# Altium PCB SurvBot_RCU.PcbDoc
Units mm, origin at the board's own origin, x right, y up, seen from the top; angles counter-clockwise.
Board outline 152.4 x 101.6 mm, 4 copper layers (Top Layer, Int1 (GND), Int2 (PWR), Bottom Layer), stack 1.591 mm thick; 147 components, 99 nets, 569 pads, 8 vias.
Unrouted connection lines stored in the file: 385.
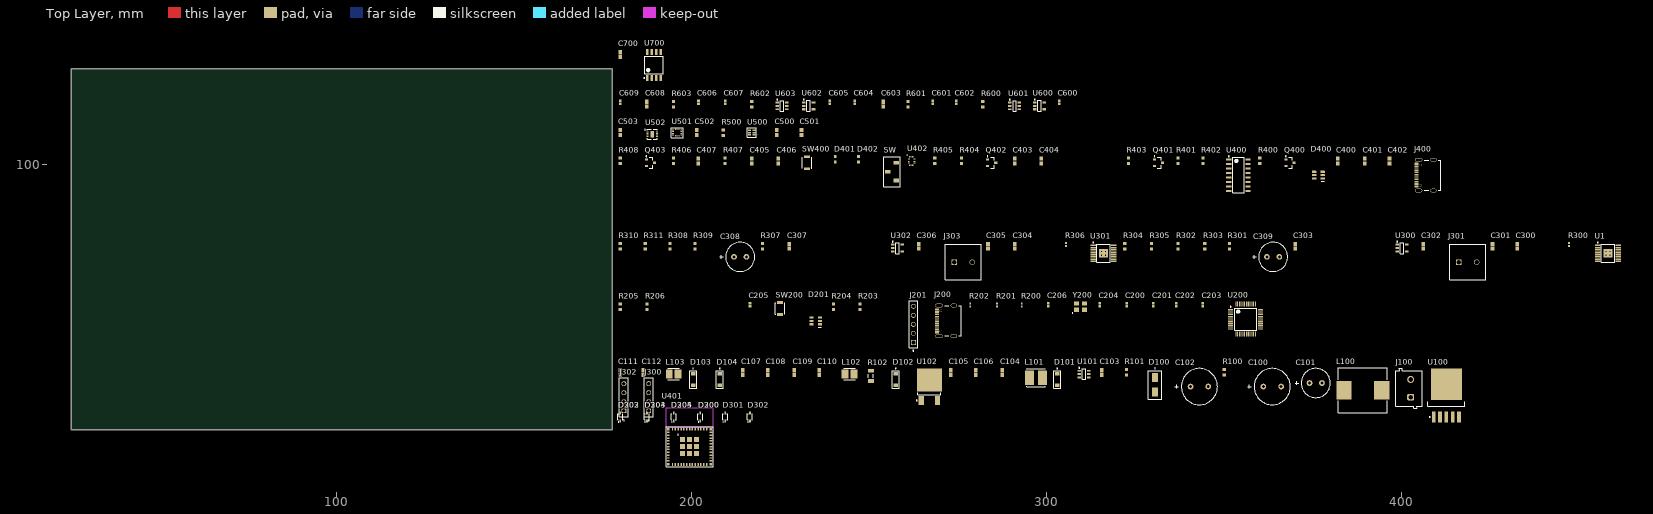
[diagram p0: Top Layer view]
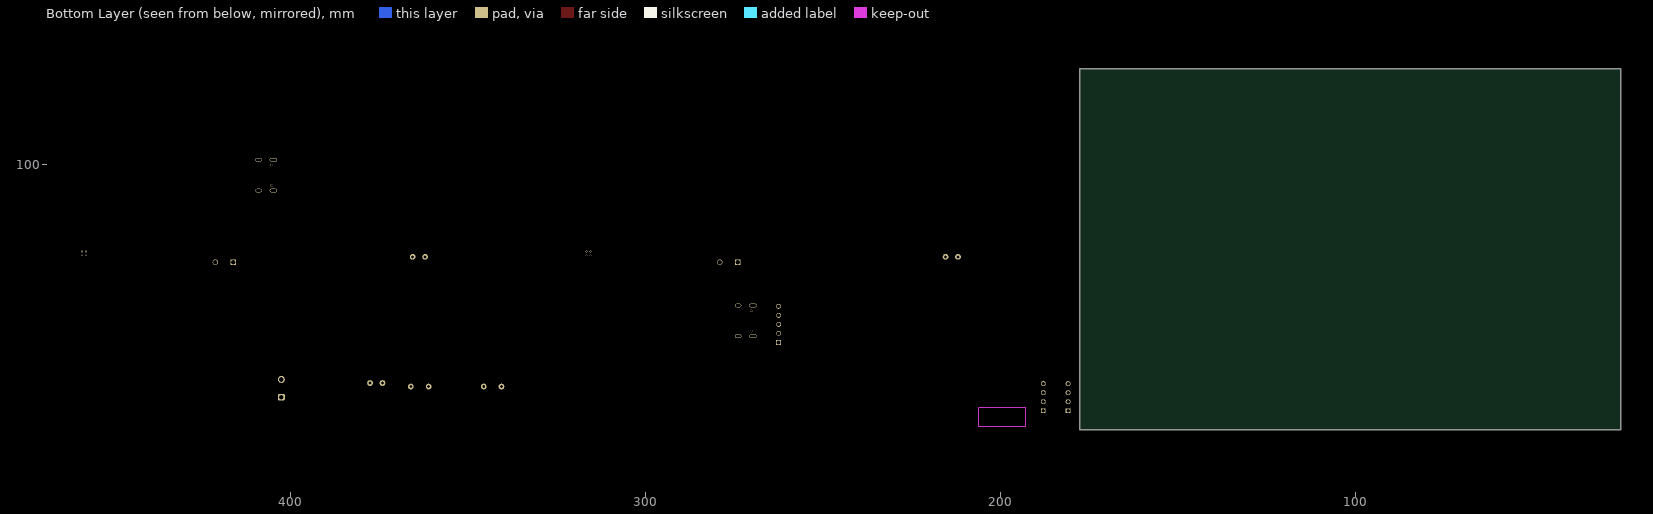
[diagram p1: Bottom Layer view, seen from below]

## Layer stack, top to bottom
Top Solder: solder mask 0.0254, SM-001, Dk 4
Top Layer: signal copper 0.035
Dielectric 1: prepreg 0.2104, PP-017, Dk 4.6
Int1 (GND): signal copper 0.0175
Dielectric 3: core 1.065, Core-039, Dk 4.6
Int2 (PWR): signal copper 0.0175
Dielectric 5: prepreg 0.2104, PP-017, Dk 4.6
Bottom Layer: signal copper 0.035
Bottom Solder: solder mask 0.0254, SM-001, Dk 4

## Board outline
25.4,25.4 177.8,25.4 177.8,127 25.4,127

## Design rules (kind name [scope] priority, off if disabled: settings)
Clearance [All] p1: gap=0.2 ignorepadtopadclearanceinfootprint=TRUE except(0.15: Arc-Arc Arc-Track Arc-SMDPad Arc-THPad Track-Track Track-SMDPad Track-THPad)
DiffPairsRouting [All] p1: maxlimit=0.254 minlimit=0.254 mostfreqgap=0.254 toplayer_minwidth=0.381 toplayer_maxwidth=0.381 toplayer_prefwidth=0.381 midlayer1_minwidth=0.381 midlayer1_maxwidth=0.381 midlayer1_prefwidth=0.381 midlayer2_minwidth=0.381 midlayer2_maxwidth=0.381 midlayer2_prefwidth=0.381 bottomlayer_minwidth=0.381 bottomlayer_maxwidth=0.381 bottomlayer_prefwidth=0.381 maxuncoupledlength=12.7
PolygonConnect [All] p1: connectstyle=Relief reliefconductorwidth=0.254 reliefentries=4 polygonreliefangle="90 Angle" airgapwidth=0.254
RoutingVias [All] p1: holewidth=0.711 width=1.27 viastyle="Through Hole" minholewidth=0.711 minwidth=1.27 maxholewidth=0.711 maxwidth=1.27
SolderMaskExpansion [All] p1: expansion=0.102 istentingtop=FALSE
SupplyNets "Schematic Supply Nets_4" [InNet('GND')] p1: voltage=0.000
SupplyNets "Schematic Supply Nets_9" [InNet('VBUS2')] p2: voltage=0.000
SupplyNets "Schematic Supply Nets_8" [InNet('+3V3')] p3: voltage=0.000
SupplyNets "Schematic Supply Nets_7" [InNet('VBUS1')] p4: voltage=0.000
SupplyNets "Schematic Supply Nets_6" [InNet('+VCOM')] p5: voltage=0.000
SupplyNets "Schematic Supply Nets_5" [InNet('+5VC')] p6: voltage=0.000
SupplyNets "Schematic Supply Nets_3" [InNet('+3V3A')] p7: voltage=0.000
SupplyNets "Schematic Supply Nets_2" [InNet('+6V')] p8: voltage=0.000
SupplyNets "Schematic Supply Nets_1" [InNet('+5VF')] p9: voltage=0.000
SupplyNets "Schematic Supply Nets" [InNet('+VBATT')] p10: voltage=0.000
UnRoutedNet [All] p1: checkbadconnections=TRUE
Width [All] p1: maxlimit=0.254 minlimit=0.254 preferedwidth=0.254
28 further rules are at their usual default settings.

## Classes and differential pairs
differential pair class USB: BT_USB_D USB_D
component class U_7_SurvBot_RCU_ExternalMemory: C700 U700
component class U_6_SurvBot_RCU_CurrentFeedback: C600 C601 C602 C603 C604 C605 C606 C607 C608 C609 R600 R601 R602 R603 U600 U601 U602 U603
component class U_5_SurvBot_RCU_Sensors: C500 C501 C502 C503 R500 U500 U501 U502
component class U_4_SurvBot_RCU_Bluetooth: C400 C401 C402 C403 C404 C405 C406 C407 D400 D401 D402 J400 Q400 Q401 Q402 Q403 R400 R401 R402 R403 R404 R405 R406 R407 R408 SW SW400 U400 U401 U402
component class U_3_SurvBot_RCU_MotorControl: C300 C301 C302 C303 C304 C305 C306 C307 C308 C309 D300 D301 D302 D303 D304 D305 J300 J301 J302 J303 R300 R301 R302 R303 R304 R305 R306 R307 R308 R309 R310 R311 U1 U300 U301 U302
component class U_2_SurvBot_RCU_MCU: C200 C201 C202 C203 C204 C205 C206 D200 D201 D202 D203 D204 J200 J201 R200 R201 R202 R203 R204 R205 R206 SW200 U200 Y200
component class U_1_SurvBot_RCU_Power: C100 C101 C102 C103 C104 C105 C106 C107 C108 C109 C110 C111 C112 D100 D101 D102 D103 D104 J100 L100 L101 L102 L103 R100 R101 R102 U100 U101 U102
differential pair USB_D: +USB_D_P -USB_D_N
differential pair BT_USB_D: +BT_USB_D_P -BT_USB_D_N

## Components (designator, comment, footprint, x,y, rotation, side; value= is the part's Value field where it differs from the comment)
C100 "470uF" CAP-THT_RADIAL_D10.00mm_P5.00mm 360.999,37.5 r0 top
C101 "100uF" CAP-THT-Radial__D8.0mmP3.5mm 373.999,38.5 r0 top
C102 "1000uF" CAP-THT_RADIAL_D10.00mm_P5.00mm 340.499,37.5 r0 top
C103 "100nF" CAP_0603 315.499,41.5 r90 top
C104 "22uF" CAP_0603 287.499,41.5 r90 top
C105 "22uF" CAP_0603 272.999,41.5 r90 top
C106 "22uF" CAP_0603 279.999,41.5 r90 top
C107 "1uF" CAP_0603 214.5,41.5 r90 top
C108 "1uF" CAP_0603 221.5,41.5 r90 top
C109 "22uF" CAP_0603 229,41.5 r90 top
C110 "22uF" CAP_0603 236,41.5 r90 top
C111 "1uF" CAP_0603 180,41.5 r90 top
C112 "1uF" CAP_0603 186.5,41.5 r90 top
C200 "1uF" CAP_0402 322.499,60.5 r90 top
C201 "100nF" CAP_0402 329.999,60.5 r90 top
C202 "4.7uF" CAP_0402 336.499,60.5 r90 top
C203 "100nF" CAP_0402 343.999,60.5 r90 top
C204 "14pF" CAP_0402 314.999,60.5 r90 top
C205 "100nF" CAP_0402 216.5,60.5 r90 top
C206 "14pF" CAP_0402 300.499,60.5 r90 top
C300 "100nF" CAP_0603 432.499,77 r90 top
C301 "22nF" CAP_0603 425.499,77 r90 top
C302 "100nF" CAP_0603 405.999,77 r90 top
C303 "100nF" CAP_0603 369.999,77 r90 top
C304 "100nF" CAP_0603 290.999,77 r90 top
C305 "22nF" CAP_0603 283.499,77 r90 top
C306 "100nF" CAP_0603 263.999,77 r90 top
C307 "100nF" CAP_0603 227.5,77 r90 top
C308 "220uF" CAP-THT-Radial__D8.0mmP3.5mm 212,74 r0 top
C309 "220uF" CAP-THT-Radial__D8.0mmP3.5mm 361.999,74 r0 top
C400 "10uF" CAP_0603 381.999,101 r90 top
C401 "100nF" CAP_0603 389.499,101 r90 top
C402 "100nF" CAP_0603 396.499,101 r90 top
C403 "1uF" CAP_0603 290.999,101 r90 top
C404 "100nF" CAP_0603 298.5,101 r90 top
C405 "100nF" CAP_0603 217,101 r90 top
C406 "1uF" CAP_0603 224.5,101 r90 top
C407 "100nF" CAP_0603 202,101 r90 top
C500 "100nF" CAP_0603 224,109 r90 top
C501 "100nF" CAP_0603 231,109 r90 top
C502 "1uF" CAP_0603 201.5,109 r90 top
C503 "100nF" CAP_0603 180,109 r90 top
C600 "100nF" CAP_0402 303.499,117.5 r90 top
C601 "10uF" CAP_0402 267.999,117.5 r90 top
C602 "100nF" CAP_0402 274.499,117.5 r90 top
C603 "100nF" CAP_0603 253.999,117 r90 top
C604 "1nF" CAP_0402 246,117.5 r90 top
C605 "100nF" CAP_0402 239,117.5 r90 top
C606 "10uF" CAP_0402 202,117.5 r90 top
C607 "100nF" CAP_0402 209.5,117.5 r90 top
C608 "100nF" CAP_0603 187.5,117 r90 top
C609 "1nF" CAP_0402 180,117.5 r90 top
C700 "1uF" CAP_0603 180,131 r90 top
D100 "B340AE-13" "DO-214AC, SMA" 330.499,38 r90 top
D101 "SM5817PL-TP" DIO-SOD-123FL 302.999,39.5 r90 top
D102 "SM5817PL-TP" DIO-SOD-123FL 257.499,39.5 r90 top
D103 "SM5817PL-TP" DIO-SOD-123FL 200.5,39.5 r90 top
D104 "SM5817PL-TP" DIO-SOD-123FL 208,39.5 r90 top
D200 "PESD3V3L1BA,115" "SC-76, SOD-323" 202.5,29 r90 top
D201 "USBLC6-2SC6" SOT-23-6 235,56 r90 top
D202 "PESD3V3L1BA,115" "SC-76, SOD-323" 180,29 r90 top
D203 "PESD3V3L1BA,115" "SC-76, SOD-323" 187.5,29 r90 top
D204 "PESD3V3L1BA,115" "SC-76, SOD-323" 195,29 r90 top
D300 "PESD3V3L1BA,115" "SC-76, SOD-323" 202.5,29 r90 top
D301 "PESD3V3L1BA,115" "SC-76, SOD-323" 209.5,29 r90 top
D302 "PESD3V3L1BA,115" "SC-76, SOD-323" 216.5,29 r90 top
D303 "PESD3V3L1BA,115" "SC-76, SOD-323" 180,29 r90 top
D304 "PESD3V3L1BA,115" "SC-76, SOD-323" 187.5,29 r90 top
D305 "PESD3V3L1BA,115" "SC-76, SOD-323" 195,29 r90 top
D400 "USBLC6-2SC6" SOT-23-6 376.499,97 r90 top
D401 "Green_150060GS75000" LED_0603 240.5,101.5 r90 top
D402 "Blue_150060BS75000" LED_0603 247,101.5 r90 top
J100 "691102710002" 691102710002 401.999,37 r90 top
J200 "TYPE-C-31-M-12" USB4105-GF-A-060 271.499,56 r90 top
J201 "CONN 1x5" 2541FV-5P 262.499,55 r90 top
J300 "CONN 1x4" 2541FV-4P 188,34.5 r90 top
J301 "WJ500V-5.08-2P" WJ500V-5.08-2P 418.499,72.5 r0 top
J302 "CONN 1x4" 2541FV-4P 181,34.5 r90 top
J303 "WJ500V-5.08-2P" WJ500V-5.08-2P 276.499,72.5 r0 top
J400 "TYPE-C-31-M-12" USB4105-GF-A-060 406.499,97 r90 top
L100 "68uH" IND-SMD_13.45x12.45mm 388.999,36.5 r0 top
L101 "15uH" "IND-SMD_ 4.90x4.90mm" 296.999,40 r0 top
L102 "3.9uH" IND_SMD-3.00MMX3.00MM 244.5,41 r0 top
L103 "3.9uH" IND_SMD-3.00MMX3.00MM 195,41 r0 top
Q400 "2N7002NXAKR" SOT23-3 368.499,100.5 r0 top
Q401 "2N7002NXAKR" SOT23-3 331.499,100.5 r0 top
Q402 "BSS84AK,215" SOT23-3 284.499,100.5 r0 top
Q403 "2N7002NXAKR" SOT23-3 188.5,100.5 r0 top
R100 "5.9K" RES_0603 349.999,41.5 r90 top
R101 "1.5K" RES_0603 322.499,41.5 r90 top
R102 "5R1" RES_1206 250.499,40.5 r90 top
R200 "0R" RES_0402 292.999,60.5 r90 top
R201 "10k" RES_0402 285.999,60.5 r90 top
R202 "10k" RES_0402 278.499,60.5 r90 top
R203 "49R9" RES_0603 247.5,60 r90 top
R204 "49R9" RES_0603 240,60 r90 top
R205 "5.1K" RES_0603 180,60 r90 top
R206 "5.1K" RES_0603 187.5,60 r90 top
R300 "10k" RES_0402 446.999,77.5 r90 top
R301 "2.2K" RES_0603 351.499,77 r90 top
R302 "20K" RES_0603 336.999,77 r90 top
R303 "20K" RES_0603 344.499,77 r90 top
R304 "40K" RES_0603 321.999,77 r90 top
R305 "40K" RES_0603 329.499,77 r90 top
R306 "10k" RES_0402 305.499,77.5 r90 top
R307 "2.2K" RES_0603 220,77 r90 top
R308 "20K" RES_0603 194,77 r90 top
R309 "20K" RES_0603 201,77 r90 top
R310 "40K" RES_0603 180,77 r90 top
R311 "40K" RES_0603 187,77 r90 top
R400 "10K" RES_0603 359.999,101 r90 top
R401 "5.1K" RES_0603 336.999,101 r90 top
R402 "5.1K" RES_0603 343.999,101 r90 top
R403 "10K" RES_0603 322.999,101 r90 top
R404 "20R" RES_0603 275.999,101 r90 top
R405 "10K" RES_0603 268.499,101 r90 top
R406 "10K" RES_0603 195,101 r90 top
R407 "20R" RES_0603 209.5,101 r90 top
R408 "20R" RES_0603 180,101 r90 top
R500 "10K" RES_0603 209,109 r90 top
R600 "1.6K" RES_0603 281.999,117 r90 top
R601 "15R" RES_0603 260.999,117 r90 top
R602 "1.6K" RES_0603 217,117 r90 top
R603 "15R" RES_0603 195,117 r90 top
SW "SPDT_JS102011JCQN" SPDT_Slide-JS102011JCQN 256.499,98 r90 top
SW200 "B3U-1000P" FP-B3U-1000P-MFG 225,59.5 r90 top
SW400 "B3U-1000P" FP-B3U-1000P-MFG 232.5,100.5 r90 top
U1 "DRV8876PWPR" 16-HTSSOP 457.999,75 r0 top
U100 "LM2576S-ADJ" "TO-263-6, D2PAK (5 Leads + Tab), TO-263BA" 412.499,35 r90 top
U101 "AP63203WU-7" "SOT-23-6 Thin, TSOT-23-6" 310.499,41 r0 top
U102 "AZ1117ID-3.3TRG1" "TO-252-3, DPAK (2 Leads + Tab), SC-63" 266.999,37 r90 top
U200 "STM32G0B1CBT6" "48-LQFP (7x7mm)" 355.999,56.5 r0 top
U300 "OPA320AIDBVR" SOT-23-5 399.999,76.5 r0 top
U301 "DRV8876PWPR" 16-HTSSOP 315.999,75 r0 top
U302 "OPA320AIDBVR" SOT-23-5 257.999,76.5 r0 top
U400 "CH340C" SOP-16 353.999,97 r0 top
U401 "ESP32-C3-MINI-1-N4" ESP32­C3­MINI­1 199.5,20.6 r0 top
U402 "DG2788ADN-T1-GE4" UQFN-16-DG2788ADN-T1-GE4 261.999,101 r0 top
U500 "APDS-9306-065" APDS-9306-065 217,109 r90 top
U501 "LSM6DS3TR-C" LGA-14_LSM6DS3TR-C 196,109 r0 top
U502 "SHT30-DIS-B2.5KS" "8-VFDFN Exposed Pad" 189,108.5 r0 top
U600 "OPA320AIDBVR" SOT-23-5 297.999,116.5 r0 top
U601 "ADC121C027CIMK/NOPB" "SOT-23-6 Thin, TSOT-23-6" 290.999,116.5 r0 top
U602 "OPA320AIDBVR" SOT-23-5 233,116.5 r0 top
U603 "ADC121C027CIMK/NOPB" "SOT-23-6 Thin, TSOT-23-6" 225.5,116.5 r0 top
U700 "SST26VF032BT-104I/SM" "8-SOIC, 5.26x5.25mm" 189.5,128 r90 top
Y200 "16MHz" SMD3225-4P 309.499,60 r0 top

## Footprints (in the part's own frame and the unit in brackets; to place one, negate y for a bottom-side part, rotate by r counter-clockwise, add the part's x,y. Pads: shape width x height; smd on the part's side, far side on the other; paste and mask are expansions set on the pad)
"8-SOIC, 5.26x5.25mm" [mm] "SOIC, 8-Leads, Body 5.26x5.25mm, Pitch 1.27mm, IPC Medium Density"
  rect 1.7x0.65 smd: 1(-3.65,1.905) 2(-3.65,0.635) 3(-3.65,-0.635) 4(-3.65,-1.905) 5(3.65,-1.905) 6(3.65,-0.635) 7(3.65,0.635) 8(3.65,1.905)
  silkscreen extent -3.77,-2.65 2.45,2.9, body extent -3.97,-2.65 3.97,2.65, height 2.03
"8-VFDFN Exposed Pad" [mm] "QFN, 8-Leads, Body 2.45x2.45mm, Pitch 0.50mm/0.40mm, Thermal Pad 1.10x1.80mm, IPC Medium Density"
  rect 0.55x0.25 smd: 1(-1.325,0.6) 2(-1.325,0.2) 3(-1.325,-0.2) 4(-1.325,-0.6) 5(1.325,-0.6) 6(1.325,-0.2) 7(1.325,0.2) 8(1.325,0.6)
  rect 1.1x1.8 smd: 8(0,0)
  silkscreen extent -2.17,-1.4 1.4,1.4, body extent -1.25,-1.25 1.25,1.25, height 1
16-HTSSOP [mm] "HTSSOP, 16-Leads, Body 5.00x4.40mm, Pitch 0.65mm, Thermal Pad 2.31x2.46mm, IPC Medium Density"
  rect 1.5x0.45 smd: 1(-2.9,2.275) 2(-2.9,1.625) 3(-2.9,0.975) 4(-2.9,0.325) 5(-2.9,-0.325) 6(-2.9,-0.975) 7(-2.9,-1.625) 8(-2.9,-2.275) 9(2.9,-2.275) 10(2.9,-1.625) 11(2.9,-0.975) 12(2.9,-0.325) 13(2.9,0.325) 14(2.9,0.975) 15(2.9,1.625) 16(2.9,2.275)
  rect 2.46x2.31 smd: 16(0,0)
  silkscreen extent -3.02,-2.55 1.85,3.17, body extent -3.2,-2.5 3.2,2.5, height 1.13
"48-LQFP (7x7mm)" [mm] "LQFP, 48-Leads, Body 7.00x7.00mm, Pitch 0.50mm, IPC Medium Density"
  rect 1.45x0.3 smd: 1(-4.225,2.75) 2(-4.225,2.25) 3(-4.225,1.75) 4(-4.225,1.25) 5(-4.225,0.75) 6(-4.225,0.25) 7(-4.225,-0.25) 8(-4.225,-0.75) 9(-4.225,-1.25) 10(-4.225,-1.75) 11(-4.225,-2.25) 12(-4.225,-2.75) 25(4.225,-2.75) 26(4.225,-2.25) 27(4.225,-1.75) 28(4.225,-1.25) 29(4.225,-0.75) 30(4.225,-0.25) 31(4.225,0.25) 32(4.225,0.75) 33(4.225,1.25) 34(4.225,1.75) 35(4.225,2.25) 36(4.225,2.75)
  rect 0.3x1.45 smd: 13(-2.75,-4.225) 14(-2.25,-4.225) 15(-1.75,-4.225) 16(-1.25,-4.225) 17(-0.75,-4.225) 18(-0.25,-4.225) 19(0.25,-4.225) 20(0.75,-4.225) 21(1.25,-4.225) 22(1.75,-4.225) 23(2.25,-4.225) 24(2.75,-4.225) 37(2.75,4.225) 38(2.25,4.225) 39(1.75,4.225) 40(1.25,4.225) 41(0.75,4.225) 42(0.25,4.225) 43(-0.25,4.225) 44(-0.75,4.225) 45(-1.25,4.225) 46(-1.75,4.225) 47(-2.25,4.225) 48(-2.75,4.225)
  silkscreen extent -4.35,-3.1 3.1,3.57, body extent -4.5,-4.5 4.5,4.5, height 1.6
2541FV-4P [mm]
  rect 1.39x1.39 hole 1.04: 1(-3.81,0)
  round 1.39 hole 1.04: 2(-1.27,0) 3(1.27,0) 4(3.81,0)
  silkscreen extent -6.6,-1.3 5.48,1.3, body extent -5.33,-1.27 5.33,1.27, height 8.52
2541FV-5P [mm]
  rect 1.39x1.39 hole 1.04: 1(-5.08,0)
  round 1.39 hole 1.04: 2(-2.54,0) 3(0,0) 4(2.54,0) 5(5.08,0)
  silkscreen extent -7.54,-1.2 6.6,1.2, body extent -6.6,-1.27 6.6,1.27, height 15.89
691102710002 [mm] "5,00mm - modular - blue - Horizontal entry with pressure clamp - 9,9 mm height - 02p"
  rrect50% 1.95x1.95 hole 1.3: 1(-2.5,-0.45)
  round 1.95 hole 1.3: 2(2.5,-0.45)
  silkscreen extent -5.6,-3.75 5.6,3.75, body extent -5.6,-3.75 5.6,3.75, height 9.96
APDS-9306-065 [mm]
  rect 0.4x0.9 smd: 1(-0.65,-0.65) 2(0,0.65) 2(0,-0.65) 3(0.65,-0.65) 4(0.65,0.65) 6(-0.65,0.65)
  silkscreen extent -1.3,-1.6 1.3,1.3, body extent -1,-1 1,1, height 0.76
CAP-THT-Radial__D8.0mmP3.5mm [mm]
  round 1.6 hole 0.8: 1(0,0) 2(3.5,0)
  silkscreen extent -4.06,-4.1 5.85,4.1, body extent -2.25,-3.99 5.75,3.99, height 10.56
CAP-THT_RADIAL_D10.00mm_P5.00mm [mm]
  round 1.6 hole 0.8: 1(0,0) 2(5,0)
  silkscreen extent -4.44,-5.1 7.6,5.1, body extent -2.49,-4.98 7.5,5, height 16.01
CAP_0402 [mm] "Chip Capacitor, 2-Leads, Body 1.00x0.50mm, IPC Medium Density"
  rect 0.72x0.72 smd: 1(-0.45,0) 2(0.45,0)
  body extent -0.6,-0.35 0.6,0.35, height 0.7
CAP_0603 [mm] "Chip Capacitor, 2-Leads, Body 1.60x0.80mm, IPC Medium Density"
  rect 1.15x1 smd: 1(-0.675,0) 2(0.675,0)
  body extent -0.9,-0.5 0.9,0.5, height 1
DIO-SOD-123FL [mm]
  rect 0.91x1.22 smd: A(-1.635,0) K(1.635,0)
  silkscreen extent -2.5,-1 3.2,1, body extent -1.85,-0.82 1.85,0.82, height 1.21
"DO-214AC, SMA" [mm]
  rect 2.5x1.7 smd: A(-2,0) K(2,0)
  silkscreen extent -4,-1.9 4.83,1.9, body extent -2.6,-1.3 2.6,1.3, height 2.4
ESP32­C3­MINI­1 [mm]
  rect 0.8x0.4 smd: 1(-6,4) 2(-6,3.2) 3(-6,2.4) 4(-6,1.6) 5(-6,0.8) 6(-6,0) 7(-6,-0.8) 8(-6,-1.6) 9(-6,-2.4) 10(-6,-3.2) 11(-6,-4) 25(6,-4) 26(6,-3.2) 27(6,-2.4) 28(6,-1.6) 29(6,-0.8) 30(6,0) 31(6,0.8) 32(6,1.6) 33(6,2.4) 34(6,3.2) 35(6,4)
  rect 0.4x0.8 smd: 12(-4.8,-5) 13(-4,-5) 14(-3.2,-5) 15(-2.4,-5) 16(-1.6,-5) 17(-0.8,-5) 18(0,-5) 19(0.8,-5) 20(1.6,-5) 21(2.4,-5) 22(3.2,-5) 23(4,-5) 24(4.8,-5) 36(4.8,5) 37(4,5) 38(3.2,5) 39(2.4,5) 40(1.6,5) 41(0.8,5) 42(0,5) 43(-0.8,5) 44(-1.6,5) 45(-2.4,5) 46(-3.2,5) 47(-4,5) 48(-4.8,5)
  rect 1.45x1.45 smd: 49(-1.975,-1.975) 49(-1.975,0) 49(-1.975,1.975) 49(0,-1.975) 49(0,0) 49(0,1.975) 49(1.975,-1.975) 49(1.975,0) 49(1.975,1.975)
  rect 0.7x0.7 smd: 50(5.95,4.95) 51(5.95,-4.95) 52(-5.95,-4.95) 53(-5.95,4.95)
  Keep-Out Layer lines w0.254: -6.6,5.6 -6.6,11 6.6,11 6.6,5.6 -6.6,5.6
  silkscreen extent -6.6,-5.6 6.6,5.6, body extent -6.6,-5.6 6.6,11, height 2.56
FP-B3U-1000P-MFG [mm]
  rect 0.8x1.7 smd paste+0 mask+0: 1(-1.7,0) 2(1.7,0)
  silkscreen extent -1.6,-1.35 1.6,1.35, body extent -2.2,-1.45 2.2,1.45, height 0.25
IND-SMD_13.45x12.45mm [mm] "Precision Wire Wound Inductor, 2-Leads, Body 13.45x12.45mm, IPC Medium Density"
  rect 4.3x5.15 smd: 1(-5.325,0) 2(5.325,0)
  silkscreen extent -6.9,-6.3 6.9,6.3, body extent -6.83,-6.22 6.83,6.22, height 6.1
"IND-SMD_ 4.90x4.90mm" [mm] "Precision Wire Wound Inductor, 2-Leads, Body 4.90x4.90mm, IPC Medium Density"
  rect 2.5x4 smd: 1(-1.8,0) 2(1.8,0)
  silkscreen extent -2.55,-2.55 2.55,2.55, body extent -2.55,-2.45 2.55,2.45, height 2.1
IND_SMD-3.00MMX3.00MM [mm] "Precision Wire Wound Inductor, 2-Leads, Body 3.00x3.00mm, IPC Medium Density"
  rect 1.9x2.6 smd: 1(-1.25,0) 2(1.25,0)
  silkscreen extent -1.6,-1.6 1.6,1.6, body extent -1.6,-1.5 1.6,1.5, height 1.3
LED_0603 [mm]
  rect 0.8x0.8 smd: 1(-0.8,0) 2(0.8,0)
  body extent -0.8,-0.4 0.8,0.4, height 0.7
LGA-14_LSM6DS3TR-C [mm]
  rect 0.45x0.25 smd: 1(-1.175,0.75) 2(-1.175,0.25) 3(-1.175,-0.25) 4(-1.175,-0.75) 8(1.175,-0.75) 9(1.175,-0.25) 10(1.175,0.25) 11(1.175,0.75)
  rect 0.25x0.45 smd: 5(-0.5,-0.925) 6(0,-0.925) 7(0.5,-0.925) 12(0.5,0.925) 13(0,0.925) 14(-0.5,0.925)
  silkscreen extent -1.65,-1.4 1.65,1.4, body extent -1.5,-1.25 1.5,1.25, height 0.97
RES_0402 [mm] "Chip Resistor, 2-Leads, Body 1.00x0.50mm, IPC Medium Density"
  rect 0.6x0.55 smd: 1(-0.425,0) 2(0.425,0)
  body extent -0.53,-0.28 0.53,0.28, height 0.4
RES_0603 [mm] "Chip Resistor, 2-Leads, Body 1.60x0.80mm, IPC Medium Density"
  rect 0.85x0.9 smd: 1(-0.775,0) 2(0.775,0)
  body extent -0.85,-0.45 0.85,0.45, height 0.55
RES_1206 [mm] "Chip Resistor, 2-Leads, Body 3.10x1.60mm, IPC Medium Density"
  rect 1.05x1.7 smd: 1(-1.425,0) 2(1.425,0)
  silkscreen extent -0.5,-0.75 0.5,0.75, body extent -1.6,-0.85 1.6,0.85, height 0.65
"SC-76, SOD-323" [mm] "SODFL, 2-Leads, Body 1.25x2.50mm, IPC Medium Density"
  rect 0.85x0.45 smd: K1(-1.125,0) K2(1.125,0)
  silkscreen extent -1.5,-0.7 0.9,0.7, body extent -1.25,-0.67 1.25,0.67, height 1.1
SMD3225-4P [mm]
  rect 1.4x1.2 smd: 1(-1.1,-0.85) 2(1.1,-0.85) 3(1.1,0.85) 4(-1.1,0.85)
  silkscreen extent -2.3,-1.9 -2.1,-1.7, body extent -1.6,-1.25 1.6,1.25, height 0.81
SOP-16 [mm] "SOP, 16-Leads, Body 9.90x3.90mm, Pitch 1.27mm, IPC Medium Density"
  rect 1.45x0.6 smd: 1(-2.725,4.445) 2(-2.725,3.175) 3(-2.725,1.905) 4(-2.725,0.635) 5(-2.725,-0.635) 6(-2.725,-1.905) 7(-2.725,-3.175) 8(-2.725,-4.445) 9(2.725,-4.445) 10(2.725,-3.175) 11(2.725,-1.905) 12(2.725,-0.635) 13(2.725,0.635) 14(2.725,1.905) 15(2.725,3.175) 16(2.725,4.445)
  silkscreen extent -2.85,-5 1.6,5.42, body extent -3,-5 3,5, height 1.65
SOT23-3 [mm] "SOT23, 3-Leads, Body 2.90x2.30mm, Pitch 0.95mm, IPC Medium Density"
  rect 0.9x0.6 smd: 1(-1.15,0.95) 2(-1.15,-0.95) 3(1.15,0)
  silkscreen extent -1.27,-1.5 0.7,1.92, body extent -1.3,-1.5 1.3,1.5, height 1.1
SOT-23-5 [mm] "SOT23, 5-Leads, Body 2.90x2.80mm, Pitch 0.95mm, IPC Medium Density"
  rect 1.05x0.6 smd: 1(-1.35,0.95) 2(-1.35,0) 3(-1.35,-0.95) 4(1.35,-0.95) 5(1.35,0.95)
  silkscreen extent -1.47,-1.55 0.5,1.92, body extent -1.5,-1.53 1.5,1.53, height 1.45
SOT-23-6 [mm]
  rrect25% 0.6x1.2 smd: 1(-0.95,-1.2) 2(0,-1.2) 3(0.95,-1.2) 4(0.95,1.2) 5(0,1.2) 6(-0.95,1.2)
  silkscreen extent -1.75,-1.63 -1.75,-0.76, body extent -1.45,-1.4 1.45,1.4, height 1.45
"SOT-23-6 Thin, TSOT-23-6" [mm] "SOT23, 6-Leads, Body 2.90x2.80mm, Pitch 0.95mm, IPC Medium Density"
  rect 1x0.55 smd: 1(-1.35,0.95) 2(-1.35,0) 3(-1.35,-0.95) 4(1.35,-0.95) 5(1.35,0) 6(1.35,0.95)
  silkscreen extent -1.47,-1.5 0.45,1.9, body extent -1.4,-1.5 1.4,1.5, height 1
SPDT_Slide-JS102011JCQN [mm]
  rect 1x1.6 smd: 1(-2.5,-1.2) 2(0,1.2) 3(2.5,-1.2)
  silkscreen extent -4.25,-2.3 4.25,2.3, body extent -4.25,-2 4.25,2, height 5.41
"TO-252-3, DPAK (2 Leads + Tab), SC-63" [mm] "D-PAK, 3-Pads (2 Leads + Tab), IPC Medium Density"
  rect 2.5x1.5 smd: 1(-3.4,2.29) 3(-3.4,-2.29)
  rect 6.4x7 smd: 2(2.35,0)
  silkscreen extent -3.52,-3.25 -1.25,3.71, body extent -3.91,-3.22 5.99,3.22, height 2.52
"TO-263-6, D2PAK (5 Leads + Tab), TO-263BA" [mm] "D2-PAK, 6-Pads (5 Leads + Tab), Body 7.55x8.56mm (max), IPC Medium Density"
  rect 3x1.05 smd: 1(-6.05,3.56) 2(-6.05,1.78) 3(-6.05,0) 4(-6.05,-1.78) 5(-6.05,-3.56)
  rect 8.9x8.7 smd: 5(3.1,0)
  silkscreen extent -6.17,-5.2 -1.75,5.2, body extent -6.65,-5.2 7.52,5.2, height 6.02
UQFN-16-DG2788ADN-T1-GE4 [mm] "QFN, 16-Leads, Body 1.80x2.60mm, Pitch 0.40mm, IPC Medium Density"
  rect 0.562x0.225 smd: 1(-0.77,0.6)
  rect 0.463x0.225 smd: 2(-0.818,0.2) 3(-0.818,-0.2) 4(-0.818,-0.6) 9(0.818,-0.6) 10(0.818,-0.2) 11(0.818,0.2) 12(0.818,0.6)
  rect 0.225x0.463 smd: 5(-0.6,-1.219) 6(-0.2,-1.219) 7(0.2,-1.219) 8(0.6,-1.219) 13(0.6,1.218) 14(0.2,1.218) 15(-0.2,1.218) 16(-0.6,1.218)
  silkscreen extent -1.3,1.6 -1.2,1.7, body extent -1,-1.4 1,1.4, height 0.6
USB4105-GF-A-060 [mm]
  rrect25% 0.6x1.15 smd mask+0.05: A1B12(-3.2,2.378) A4B9(-2.4,2.378) B1A12(3.2,2.378) B4A9(2.4,2.378)
  rrect25% 0.3x1.15 smd mask+0.05: A5(-1.25,2.378) A6(-0.25,2.378) A7(0.25,2.378) A8(1.25,2.378) B5(1.75,2.378) B6(0.75,2.378) B7(-0.75,2.378) B8(-1.75,2.378)
  round 0.65 hole 0.65 unplated mask+0.05: MH(-2.89,1.303) MH(2.89,1.303)
  oval 1x1.8 hole 0.6 slot 1.4 at 90 deg: SH(-4.32,-2.377) SH(4.32,-2.377)
  oval 1x2.1 hole 0.6 slot 1.7 at 90 deg: SH(-4.32,1.803) SH(4.32,1.803)
  silkscreen extent -4.25,-4.5 4.25,0.25, body extent -4.47,-4.97 4.47,2.73, height 3.27
WJ500V-5.08-2P [mm]
  rect 1.52x1.52 hole 1.2: 1(-2.54,0)
  round 1.52 hole 1.2: 2(2.54,0)
  silkscreen extent -5.08,-5 5.08,5, body extent -5.67,-5.41 5.06,5.77, height 18.3

## Part data
C100: library part CAP_470uF-35V-20%-RADIAL-TH, "470 µF 35 V Aluminum Electrolytic Capacitors Radial, Can 10000 Hrs @ 105°C", Case/Package=TH,D10xL16mm, Manufacturer=Rubycon, Manufacturer Part #=35ZLH470MEFC10X16, Supplier=JLCPCB, Supplier Part #=C338196
C101: library part CAP_100uF-50V-20%-RADIAL-TH, "100 µF 50 V Aluminum Electrolytic Capacitors Radial, Can 8000 Hrs @ 105°C", Case/Package=TH,D8xL11.5mm, Manufacturer=Rubycon, Manufacturer Part #=50ZLH100MEFC8X11.5, Supplier=JLCPCB, Supplier Part #=C109393
C102: library part CAP_1000uF-16V-20%-RADIAL-TH, "1000 µF 16 V Aluminum Electrolytic Capacitors Radial, Can 10000 Hrs @ 105°C", Case/Package=TH,D10xL16mm, Manufacturer=Rubycon, Manufacturer Part #=16ZLH1000MEFC10X16, Supplier=JLCPCB, Supplier Part #=C338175
C103 C300 C302 C303 C304 C306 C307 C401 C402 C404 C405 C407 C500 C501 C503 C603 C608: library part CAP_100nF-50V-10%-0603, "0.1 µF ±10% 50V Ceramic Capacitor X7R 0603 (1608 Metric)", Case/Package=0603, Manufacturer=KEMET, Manufacturer Part #=C0603C104K5RACAUTO, Supplier=JLCPCB, Supplier Part #=C129621
C104 C105 C106 C109 C110: library part CAP_22uF-10V-20%-0603, "22 µF ±20% 10V Ceramic Capacitor X5R 0603 (1608 Metric)", Case/Package=0603, Manufacturer="Samsung Electro-Mechanics", Manufacturer Part #=CL10A226MP8NUNE, Supplier=JLCPCB, Supplier Part #=C86295
C107 C108 C111 C112 C403 C406 C502 C700: library part CAP_1uF-16V-10%-0603, "1 µF ±10% 16V Ceramic Capacitor X7R 0603 (1608 Metric)", Case/Package=0603, Manufacturer=YAGEO, Manufacturer Part #=CC0603KRX7R7BB105, Supplier=JLCPCB, Supplier Part #=C106248
C200: library part CAP_1uF-16V-10%-0402, "1 µF ±10% 16V Ceramic Capacitor X5R 0402 (1005 Metric)", Case/Package=0402, Manufacturer="Samsung Electro-Mechanics", Manufacturer Part #=CL05A105KO5NNNC, Supplier=JLCPCB, Supplier Part #=C29266
C201 C203 C205 C600 C602 C605 C607: library part CAP_100nF-10V-10%-0402, "0.1 µF ±10% 10V Ceramic Capacitor X7R 0402 (1005 Metric)", Case/Package=0402, Manufacturer="Samsung Electro-Mechanics", Manufacturer Part #=CL05B104KP5NNNC, Supplier=JLCPCB, Supplier Part #=C133086
C202: library part CAP_4.7uF-10V-20%-0402, "4.7 µF ±20% 10V Ceramic Capacitor X5R 0402 (1005 Metric)", Case/Package=0402, Manufacturer="Samsung Electro-Mechanics", Manufacturer Part #=CL05A475MP5NRNC, Supplier=JLCPCB, Supplier Part #="Supplier Part #"
C204 C206: library part CAP_14pF-50V-5%-0402, "50V 14pF NP0 ±5% 0402 Multilayer Ceramic Capacitors MLCC - SMD/SMT ROHS", Case/Package=0402, Manufacturer="Walsin Tech Corp", Manufacturer Part #=0402N140J500CT, Supplier=JLCPCB, Supplier Part #=C458857
C301 C305: library part CAP_22nF_100V-10%-0603, "0.022 µF ±10% 100V Ceramic Capacitor X7R 0603 (1608 Metric)", Case/Package=0603, Manufacturer="Murata Electronics", Manufacturer Part #=GCM188R72A223KA37D, Supplier=JLCPCB, Supplier Part #=C161234
C308 C309: library part CAP_220uF-35V-20%_RADIAL-TH, "220 µF 35 V Aluminum Electrolytic Capacitors Radial, Can 8000 Hrs @ 105°C", Case/Package=TH,D8xL11.5mm, Manufacturer=Rubycon, Manufacturer Part #=35ZLH220MEFC8X11.5, Supplier=JLCPCB, Supplier Part #=C107639
C400: library part CAP_10uF-10V-20%-0603, "10 µF ±20% 10V Ceramic Capacitor X5R 0603 (1608 Metric)", Case/Package=0603, Manufacturer="Murata Electronics", Manufacturer Part #=GRM188R61A106ME69D, Supplier=JLCPCB, Supplier Part #=C90053
C601 C606: library part CAP_10uF-10V-20%-0402, "10 µF ±20% 10V Ceramic Capacitor X5R 0402 (1005 Metric)", Case/Package=0402, Manufacturer="Murata Electronics", Manufacturer Part #=GRM155R61A106ME11D, Supplier=JLCPCB, Supplier Part #=C408132
C604 C609: library part CAP_1nF-50V-5%-0402, "1000 pF ±5% 50V Ceramic Capacitor C0G, NP0 0402 (1005 Metric)", Case/Package=0402, Manufacturer="Murata Electronics", Manufacturer Part #=GRM1555C1H102JA01D, Supplier=JLCPCB, Supplier Part #=C76947
D100: library part DIO-S_0.5V-40V-3A-SMA, "Diode 40 V 3A Surface Mount SMA", Case/Package=SMA, Manufacturer="DIODES INCORPORATED", Manufacturer Part #=B340AE-13, Supplier=JLCPCB, Supplier Part #=C168859
D101 D102 D103 D104: library part DIO-S_0.45V-20V-1A-SOD-123FL, "Diode 20 V 1A Surface Mount SOD-123FL", Case/Package=SOD-123FL, Manufacturer="MCC(Micro Commercial Components)", Manufacturer Part #=SM5817PL-TP, Supplier=JLCPCB, Supplier Part #=C669022
D200 D202 D203 D204 D300 D301 D302 D303 D304 D305: library part DIO-TVS_3.3V-26V-18A-SOD-323, "26V Clamp 18A (8/20µs) Ipp Tvs Diode Surface Mount SOD-323", Case/Package=SOD-323, Manufacturer=Nexperia, Manufacturer Part #=PESD3V3L1BA,115, Supplier=JLCPCB, Supplier Part #=C51450
D201 D400: "Low-Capacitance ESD Protection USB", Manufacturer=STMicroelectronics, Distributor Link=https://www.mouser.de/ProductDetail/STMicroelectronics/USBLC6-2SC6?qs=po45yt2pPpu%2FhNIlwQdTlg%3D%3D, Manufacturer Part Number=USBLC6-2SC6
D401: library part LED_Green-0603, "Green 520nm LED Indication - Discrete 3.2V 0603 (1608 Metric)", Case/Package=0603, Manufacturer="Wurth Elektronik", Manufacturer Part #=150060GS75000, Supplier=JLCPCB, Supplier Part #=C5252984
D402: library part LED_Blue_0603, "Blue 470nm LED Indication - Discrete 3.2V 0603 (1608 Metric)", Case/Package=0603, Manufacturer="Wurth Elektronik", Manufacturer Part #=150060BS75000, Supplier=JLCPCB, Supplier Part #=C5197644
J100: library part CMP-1502-03258-2, Color=Blue, Current=15A, Max Operating Temperature=105°C, Min Operating Temperature=-40°C, Voltage=300V, Contact Material=Brass, Contact Plating=Tin, Current Rating=15A, Height=13.4mm, Housing Material=Nylon, Lead Pitch=5mm, Length=7.5mm, Mount="Through Hole", NexarPartId=8917706, Number of Contacts=2, Number of Levels=1, Number of Pins=2, Number of Positions Per Level=2, Packaging=Box, Pitch=5.0038mm, Plating=Steel, REACH SVHC=Unknown, RoHS=Compliant, Stripping Length=-6mm, Termination=Screw, Voltage Rating=300V, Width=11.2mm, Wire Gauge (Max)=22AWG, Wire Gauge (Min)=14AWG, Wire/Cable Gauge=22AWG
J200 J400: library part USB4105-GF-A-060_1, "5A 1 16P Female Type-C SMD USB Connectors ROHS", Manufacturer="Korean Hroparts Elec", Package=SMD, Manufacturer Part Number=TYPE-C-31-M-12, Supplier=JLCPCB, Supplier Part #=C165948
J201: library part CONN_5_HDR_0.1-2541FV-5P, "2.54mm 3A Single Row -40℃~+105℃ 250V 5P Direct Insert 1x5P Top Square Hole Plugin,P=2.54mm Female Headers ROHS", Case/Package=P=2.54mm, Manufacturer=HanElectricity, Manufacturer Part #=2541FV-5P, Supplier=JLCPCB, Supplier Part #=C18723050
J300 J302: library part CONN_4_HDR_0.1-2541FV-4P, "2.54mm 3A Single Row 4P -40℃~+105℃ 250V Direct Insert 1x4P Top Square Hole Plugin,P=2.54mm Female Headers ROHS", Case/Package=P=2.54mm, Manufacturer=HanElectricity, Manufacturer Part #=2541FV-4P, Supplier=JLCPCB, Supplier Part #=C18723049
J301 J303: library part Terminal_Screw_5.08mm_2P, "1x2P 5.08mm 2.5 1 2 18A -40℃~+105℃ 250V Green 14~30 Direct Insert Plugin,P=5.08mm Screw Terminal Blocks ROHS", Case/Package=P=5.08mm, Manufacturer="Ningbo Kangnex Elec", Manufacturer Part #=WJ500V-5.08-2P, Supplier=JLCPCB, Supplier Part #=C8465
L100: library part IND_68uH-4A-20%-SMD, "68 µH Shielded Drum Core, Wirewound Inductor 4 A 140mOhm Max Nonstandard", Case/Package=SMD,13.5x12.6mm, Manufacturer=Sunlord, Manufacturer Part #=MWSA1206S-680MT, Supplier=JLCPCB, Supplier Part #=C408532
L101: library part IND_15uH-1.2A-20%-SMD, "15 µH Shielded Drum Core, Wirewound Inductor 1.2 A 198mOhm Max Nonstandard", Case/Package=SMD,4.9x4.9mm, Manufacturer="Taiyo Yuden", Manufacturer Part #=NRS5020T150MMGJ, Supplier=JLCPCB, Supplier Part #=C222920
L102 L103: library part IND_3.9uH-2.1A-20%-SMD, "3.9 µH Shielded Drum Core, Wirewound Inductor 1.5 A 115mOhm Max Nonstandard", Case/Package=SMD,3x3mm, Manufacturer=Sunlord, Manufacturer Part #=SPH3015H3R9MT, Supplier=JLCPCB, Supplier Part #=C431700
Q400 Q401 Q403: library part MOSFET-N_60V-190mA-SOT23-3, "N-Channel 60 V 190mA (Ta), 300mA (Tc) 265mW (Ta), 1.33W (Tc) Surface Mount TO-236AB", Case/Package=SOT23-3, Manufacturer=Nexperia, Manufacturer Part #=2N7002NXAKR, Supplier=JLCPCB, Supplier Part #=C551416
Q402: library part MOSFET-P_50V-180mA-SOT23-3, "P-Channel 50 V 180mA (Ta) 350mW (Ta), 1.14W (Tc) Surface Mount TO-236AB", Case/Package=SOT-23-3, Manufacturer=Nexperia, Manufacturer Part #=BSS84AK,215, Supplier=JLCPCB, Supplier Part #=C127273
R100: library part RES_5.9K-100mW-1%-0603, "RES 5.9K OHM 1% 100mW SMD-0603 Thick film Resistor", Case/Package=0603, Manufacturer=PANASONIC, Manufacturer Part #=ERJ3EKF5901V, Supplier=JLCPCB, Supplier Part #=C403290
R101: library part RES_1.5K-250mW-1%-0603, "RES 1.5K OHM 1% 250mW SMD-0603 Thick film Resistor", Case/Package=0603, Manufacturer=PANASONIC, Manufacturer Part #=ERJPA3F1501V, Supplier Part Number=C543357, Supplier=JLCPCB
R102: library part RES_5R1-600mW-5%-1206, "600mW Thick Film Resistors 200V ±5% ±400ppm/℃ 5.1Ω 1206 Chip Resistor - Surface Mount", Case/Package=1206, Manufacturer="UNI-ROYAL(Uniroyal Elec)", Manufacturer Part #=AS0606J051JT5E, Supplier=JLCPCB, Supplier Part #=C966043
R200: library part RES_0R-62.5mW-5%-0402, "0 Ohms Jumper Chip Resistor 0402 (1005 Metric) Moisture Resistant Thick Film", Case/Package=0402, Manufacturer=YAGEO, Manufacturer Part #=RC0402JR-070RL, Supplier=JLCPCB, Supplier Part #=C60485
R201 R202 R300 R306: library part RES_10K-62.5mW-1%-0402, "10 kOhms ±1% 0.063W, 1/16W Chip Resistor 0402 (1005 Metric) Moisture Resistant Thick Film", Case/Package=0402, Manufacturer=YAGEO, Manufacturer Part #=RC0402FR-0710KL, Supplier=JLCPCB, Supplier Part #=C60490
R203 R204: library part RES_49.R9-100mW-1%-0603, "49.9 Ohms ±1% 0.1W, 1/10W Chip Resistor 0603 (1608 Metric) Automotive AEC-Q200 Thick Film", Case/Package=0603, Manufacturer=PANASONIC, Manufacturer Part #=ERJ3EKF49R9V, Supplier=JLCPCB, Supplier Part #=C403255
R205 R206 R401 R402: library part RES_5.1K-100mW-1%-0603, "5.1 kOhms ±1% 0.1W, 1/10W Chip Resistor 0603 (1608 Metric) Moisture Resistant Thick Film", Case/Package=0603, Manufacturer=YAGEO, Manufacturer Part #=RC0603FR-075K1L, Supplier=JLCPCB, Supplier Part #=C105580
R301 R307: library part RES_2.2K-100mW-1%-0603, "2.2 kOhms ±1% 0.1W, 1/10W Chip Resistor 0603 (1608 Metric) Moisture Resistant Thick Film", Case/Package=0603, Manufacturer=YAGEO, Manufacturer Part #=RC0603FR-072K2L, Supplier=JLCPCB, Supplier Part #=C114662
R302 R303 R308 R309: library part RES_20K-100mW-1%-0603, "20 kOhms ±1% 0.1W, 1/10W Chip Resistor 0603 (1608 Metric) Automotive AEC-Q200 Thick Film", Case/Package=0603, Manufacturer=PANASONIC, Manufacturer Part #=ERJ-3EKF2002V, Supplier=JLCPCB, Supplier Part #=C403057
R304 R305 R310 R311: library part RES_40K_100mW-1%-0603, "40 kOhms ±0.1% 0.1W, 1/10W Chip Resistor 0603 (1608 Metric) Anti-Sulfur, Automotive AEC-Q200, Moisture Resistant Thin Film", Case/Package=0603, Manufacturer=YAGEO, Manufacturer Part #=AT0603BRD0740KL, Supplier=JLCPCB, Supplier Part #=C5455515
R400 R403 R405 R406 R500: library part RES_10K-100mW-1%-0603, "10 kOhms ±1% 0.1W, 1/10W Chip Resistor 0603 (1608 Metric) Moisture Resistant Thick Film", Case/Package=0603, Manufacturer=YAGEO, Manufacturer Part #=RC0603FR-0710KL, Supplier=JLCPCB, Supplier Part #=C98220
R404 R407 R408: library part RES_20R-100mW-1%-0603, "20 Ohms ±1% 0.1W, 1/10W Chip Resistor 0603 (1608 Metric) Moisture Resistant Thick Film", Case/Package=0603, Manufacturer=YAGEO, Manufacturer Part #=RC0603FR-0720RL, Supplier=JLCPCB, Supplier Part #=C125758
R600 R602: library part RES_1.6K-100mW-1%-0603, "1.6 kOhms ±1% 0.1W, 1/10W Chip Resistor 0603 (1608 Metric) Moisture Resistant Thick Film", Case/Package=0603, Manufacturer=BOURNS, Manufacturer Part #=CR0603-FX-1601ELF, Supplier=JLCPCB, Supplier Part #=C203329
R601 R603: library part RES_15R-100mW-1%-0603, "15 Ohms ±1% 0.1W, 1/10W Chip Resistor 0603 (1608 Metric) Automotive AEC-Q200 Thick Film", Case/Package=0603, Manufacturer=PANASONIC, Manufacturer Part #=ERJ3EKF15R0V, Supplier=JLCPCB, Supplier Part #=C403005
SW: library part SW_SPDT_JS102011JCQN, "Slide Switch SPDT Surface Mount", Case/Package=SMD, Manufacturer=C&K, Manufacturer Part #=JS102011JCQN, Supplier=JLCPCB, Supplier Part #=C221659
SW200 SW400: library part CMP-2100-03586-2, "SWITCH TACTILE SPST-NO 0.05A 12V", Case/Package="SMD, 2.5x3mm", Contact Current Rating=50mA, Contact Resistance=100mR, Insulation Resistance=100MR, Manufacturer="Omron Electronics", Max Operating Temperature=70°C, Max Voltage Rating (DC)=12V, Min Operating Temperature=-25°C, Operating Force=1.5N, Package Quantity=1, Ratings="Dust Proof", Actuator Length=0.4mm, Actuator Type=Standard, Contact Material=Silver, Current Rating=50mA, Depth=2.5mm, Electrical Life=200000Cycles, Height=1.2mm, Illumination Type=Non-Illuminated, Lead Free="Lead Free", Length=4mm, Manufacturer Part #=B3U-1000P, Max Current Rating=50mA, Mechanical Life=200000Cycles, Mount="Surface Mount", Orientation=Straight, Packaging="Tape and Reel", Supplier=JLCPCB, Supplier Part #=C231329, Switch Function=Off-Mom, Switch Travel=0.15mm, Termination=SMD/SMT, Throw Configuration=SPST, Voltage Rating (DC)=12V, Weight=0.000776oz, Width=3mm
U1 U301: library part MTRDRV-DRV8876-HBridge_4.5-37V_3.5A, "DRV8876 H-Bridge Motor Driver With Integrated Current Sense and Regulation 16-HTSSOP", Case/Package=HTSSOP-16-EP, Manufacturer="Texas Instruments", Manufacturer Part #=DRV8876PWPR, Supplier=JLCPCB, Supplier Part #=C575551
U100: "Buck Switching Regulator IC Positive Adjustable 1 Output 3A TO-263-6, D2PAK (5 Leads + Tab), TO-263BA", Case/Package=TO-263-5, Manufacturer="UMW(Youtai Semiconductor Co., Ltd.)", Manufacturer Part #=LM2576S-ADJ, Supplier=JLCPCB, Supplier Part #=C347415
U101: library part "AP63203WU-7 TSOT-23-6", "Buck Switching Regulator IC Positive Fixed 3.3V 1 Output 2A SOT-23-6 Thin, TSOT-23-6", Case/Package=TSOT-23-6, Manufacturer="Diodes Incorporated", Manufacturer Part #=AP63203WU-7, Supplier=JLCPCB, Supplier Part #=C780769
U102: "Linear Voltage Regulator IC Positive Fixed 1 Output 1A TO-252-3", Case/Package=TO-252-2, Manufacturer="Diodes Incorporated", Manufacturer Part #=AZ1117ID-3.3TRG1, Supplier=JLCPCB, Supplier Part #=C2926306
U200: "ARM® Cortex®-M0+ STM32G0 Microcontroller IC 32-Bit Single-Core 64MHz 128KB (128K x 8) FLASH 48-LQFP (7x7)", Case/Package="48-LQFP (7x7)", Manufacturer=STMicroelectronics, Manufacturer Part #=STM32G0B1CBT6, Supplier=JLCPCB, Supplier Part #=C2847904
U300 U302 U600 U602: library part OPAMP-OPA320_R2R_SOT23-5, "General Purpose Amplifier 1 Circuit Rail-to-Rail SOT-23-5", Case/Package=SOT-23-5, Manufacturer="Texas Instruments", Manufacturer Part #=OPA320AIDBVR, Supplier=JLCPCB, Supplier Part #=C92494
U400: library part CH340C-SOP-16_USB_Converter, "2Mbps Transceiver USB 2.0 SOP-16 USB Converters ROHS", Case/Package=SOP-16, Manufacturer="WCH(Jiangsu Qin Heng)", Manufacturer Part #=CH340C, Supplier=JLCPCB, Supplier Part #=C7464026
U401: library part MCU_ESP32-C3-MINI-1-N4, "Bluetooth, WiFi 802.11b/g/n, Bluetooth v5.0 Transceiver Module 2.412GHz ~ 2.484GHz PCB Trace Surface Mount", Case/Package="53-SMD Module", Manufacturer="Espressif Systems", Manufacturer Part #=ESP32-C3-MINI-1-N4, Supplier=JLCPCB, Supplier Part #=C2838502
U402: library part IC_DG2788ADN-T1-GE4, "2 Circuit IC Switch 2:1 500mOhm 16-miniQFN (1.8x2.6)", Case/Package=UQFN-16(1.8x2.6), Manufacturer="Vishay Intertech", Manufacturer Part #=DG2788ADN-T1-GE4, Supplier=JLCPCB, Supplier Part #=C222479
U500: library part IC_APDS-9306-065, "Optical Sensor Ambient 560nm I2C 6-SMD Module", Case/Package="6-SMD Module", Manufacturer=Broadcom/AVAGO, Manufacturer Part #=APDS-9306-065, Supplier=JLCPCB, Supplier Part #=C2649498
U501: library part IC_LSM6DS3TR-C, "Accelerometer, Gyroscope, Temperature, 6 Axis Sensor I2C, SPI Output", Case/Package=LGA-14(2.5x3), Manufacturer=STMicroelectronics, Manufacturer Part #=LSM6DS3TR-C, Supplier=JLCPCB, Supplier Part #=C967633
U502: library part IC_SHT30-DIS-B2.5KS, "Humidity, Temperature 0 ~ 100% RH I2C ±2% RH 8 s Surface Mount", Case/Package="8-VFDFN Exposed Pad", Manufacturer=Sensirion, Manufacturer Part #=SHT30-DIS-B2.5KS, Supplier=JLCPCB, Supplier Part #=C77361
U601 U603: library part IC_ADC121C027CIMK/NOPB, "12 Bit Analog to Digital Converter 1 Input 1 SAR TSOT-23-6", Case/Package=TSOT-23-6L, Manufacturer="Texas Instruments", Manufacturer Part #=ADC121C027CIMK/NOPB, Supplier=JLCPCB, Supplier Part #=C201638
U700: library part IC_SST26VF032BT-104I/SM, "FLASH Memory IC 32Mbit SPI - Quad I/O 104 MHz 8-SOIJ", Case/Package=8-SOIC, Manufacturer="Microchip Tech", Manufacturer Part #=SST26VF032BT-104I/SM, Supplier=JLCPCB, Supplier Part #=C69337
Y200: library part XTAL_16MHz_SMD3225-4P, "16MHz SMD crystal oscillator 12pF ±10ppm ±30ppm SMD3225-4P Crystals ROHS", Case/Package=SMD3225-4P, Manufacturer="SJK(SHENZHEN CRYSTAL TECH)", Manufacturer Part #=7U16000E12UCG, Supplier=JLCPCB, Supplier Part #=C251610

## Via types
v1: diameter 0.5, hole 0.2, Top Layer to Bottom Layer, 8 vias

## Nets (pads, with @x,y where several pads share a name; then routed paths per layer and width w, separated by ;. In a path a pad name is that pad's centre, name@x,y a point inside that pad or via, vN(x,y) a via of type N, cw(c..) or ccw(c..) an arc to the next point about the centre after c; other vN are vias at no path point)
6V_LEFTA_OUTPUT: D304.K1 J302.2 R308.2
6V_LEFTB_OUTPUT: D303.K1 J302.3 R309.2
6V_RIGHTA_OUTPUT: D301.K1 J300.2 R302.2
6V_RIGHTB_OUTPUT: D300.K1 J300.3 R303.2
+3V3: C105.2 C106.2 C200.2 C201.2 C202.2 C203.2 C300.1 C304.1 C400.2 C401.2 C402.2 C403.2 C404.2 C500.2 C501.2 C502.2 C503.2 C700.2 D200.K1 J201.1 L101.2 Q402.2 R201.1 R202.2 R300.1 R306.1 R404.1 R405.2 R500.2 SW.1 U1.5 U101.1 U200.4 U200.5 U200.6 U300.5 U301.5 U302.5 U400.16 U401.3 U402.10 U500.3 U501.5 U501.8 U501.12 U502.5 U700.8
+3V3A: C110.2 C600.2 C601.2 C602.2 C605.2 C606.2 C607.2 U102.2 U600.5 U601.1 U602.5 U603.1
+5VC: C108.2 D102.A L102.2
+5VF: C112.2 D103.A L103.2
+6V: C102.1 C302.2 C303.2 C306.2 C307.2 C308.1 C309.1 D302.K1 D305.K1 J300.1 J302.1 L100.2 R100.2 U1.11 U301.11
+VBATT: C100.1 C101.1 D101.A J100.1 U100.1
+VCOM: C104.2 D101.K D102.K D104.K R102.1 U101.2 U101.3
ADC_LEFT_IN: C609.2 R603.1 U603.3
ADC_RIGHT_IN: C604.2 R601.1 U601.3
AWAKE_SLEEP: U1.3 U200.25 U301.3
BATT_FILT: C109.2 R102.2 U102.1
BOOST_IN: C103.2 U101.6
BT_CC1: J400.A5 R402.2
BT_CC2: J400.B5 R401.2
BT_EN: C405.2 C406.2 Q401.3 R405.1 SW400.1 U401.8
BT_PROT_USB_D_N: D400.1 U400.6
BT_PROT_USB_D_P: D400.6 U400.5
BT_USB_D_N: D400.3 J400.A7 J400.B7
BT_USB_D_P: D400.4 J400.A6 J400.B6
BUCK_FB: R100.1 R101.2 U100.4
BUCK_OUT: D100.K L100.1 U100.2
BUFFERED_L_SENSED_MOTOR_CURRENT: R602.2 U302.1 U302.4
BUFFERED_R_SENSED_MOTOR_CURRENT: R600.2 U300.1 U300.4
CTR_MODE: U1.16 U200.26 U301.16
  other v1: 315.449,74.45 316.549,74.45 457.449,74.45 458.549,74.45 315.449,75.55 316.549,75.55 457.449,75.55 458.549,75.55
DTR: Q400.2 R403.1 U400.13
GND: C100.2 C101.2 C102.2 C104.1 C105.1 C106.1 C107.1 C108.1 C109.1 C110.1 C111.1 C112.1 C200.1 C201.1 C202.1 C203.1 C204.1 C205.1 C206.1 C300.2 C303.1 C304.2 C307.1 C308.2 C309.2 C400.1 C401.1 C402.1 C403.1 C404.1 C405.1 C406.1 C407.1 C500.1 C501.1 C502.1 C503.1 C600.1 C601.1 C602.1 C603.1 C604.1 C605.1 C606.1 C607.1 C608.1 C609.1 C700.1 D100.A D200.K2 D201.2 D202.K2 D203.K2 D204.K2 D300.K2 D301.K2 D302.K2 D303.K2 D304.K2 D305.K2 D400.2 J100.2 J200.A1B12 J200.B1A12 J201.2 J300.4 J302.4 J400.A1B12 J400.B1A12 Q403.2 R101.1 R205.1 R206.1 R301.1 R304.1 R305.1 R307.1 R310.1 R311.1 R401.1 R402.1 R406.1 R407.1 SW200.2 SW400.2 U1.7 U1.9 U1.15 U100.3 U100.5 U101.4 U102.3 U200.7 U300.2 U301.7 U301.9 U301.15 U302.2 U400.1 U401.1 U401.2 U401.11 U401.14 U401.36 U401.37 U401.38 U401.39 U401.40 U401.41 U401.42 U401.43 U401.44 U401.45 U401.46 U401.47 U401.48 U401.49 U401.50 U401.51 U401.52 U401.53 U402.2 U500.6 U501.1 U501.2 U501.3 U501.7 U502.2 U502.7 U502.8 U600.2 U601.2 U601.4 U602.2 U603.2 U700.4 Y200.2 Y200.4
HOLD: U200.40 U700.7
HSE_IN: C204.2 U200.8 Y200.3
HSE_OUT_A: R200.2 U200.9
HSE_OUT_B: C206.2 R200.1 Y200.1
I2C_SCL: R202.1 U200.23 U500.1 U501.13 U502.4 U601.5 U603.5
I2C_SDA: R201.2 U200.22 U500.2 U501.14 U502.1 U601.6 U603.6
IO0: Q400.3 U401.12
L_EN/PWM: U200.48 U301.1
L_FLTRD_CURRENT: C608.2 R602.1 U602.3
L_PH/PWM: U200.20 U301.2
L_WHEEL_ENC_A: R308.1 R310.2 U200.17
L_WHEEL_ENC_B: R309.1 R311.2 U200.18
LED_BLUE_R: D402.2 R404.2
LED_BLUE_T: D402.1 Q403.3
LED_GREEN_R1: D401.1 R408.1
LED_GREEN_R2: R407.2 R408.2
LED_GREEN_T: D401.2 Q402.3
LEFT_AMP_OUT: R603.2 U602.1 U602.4
LEFT_CP_OUTPUT: C306.1 U301.12
LEFT_CPH: C305.1 U301.13
LEFT_CPL: C305.2 U301.14
LEFT_OUT1: J303.1 U301.8
LEFT_OUT2: J303.2 U301.10
LEFT_SENSED_MOTOR_CURRENT: R307.2 U301.6 U302.3
Light_sensor_INT_H: R500.1 U500.4
MCU_CC1: J200.A5 R206.2
MCU_CC2: J200.B5 R205.2
MEM_SELECT: U200.45 U700.1
NetQ400_1: Q400.1 R400.2
NetQ401_1: Q401.1 R403.2
nFAULT_L: R306.2 U200.39 U301.4
nFAULT_R: R300.2 U1.4 U200.38
NRST: C205.2 D204.K1 J201.5 SW200.1 U200.10
PRIORITY_3_POWER: D103.K D104.A
PROT_USB_D_N: D201.1 U200.33
PROT_USB_D_P: D201.6 U200.34
R_EN/PWM: U1.1 U200.15
R_FLTRD_CURRENT: C603.2 R600.1 U600.3
R_PH/PWM: U1.2 U200.14
R_WHEEL_ENC_A: R302.1 R304.2 U200.11
R_WHEEL_ENC_B: R303.1 R305.2 U200.12
RIGHT_AMP_OUT: R601.2 U600.1 U600.4
RIGHT_CP_OUTPUT: C302.1 U1.12
RIGHT_CPH: C301.1 U1.13
RIGHT_CPL: C301.2 U1.14
RIGHT_OUT1: J301.1 U1.8
RIGHT_OUT2: J301.2 U1.10
RIGHT_SENSED_MOTOR_CURRENT: R301.2 U1.6 U300.3
RTS: Q401.2 R400.1 U400.14
SPI_MISO: U200.43 U700.2
SPI_MOSI: U200.44 U700.5
SPI_SCK: U200.42 U700.6
SWCLK: D203.K1 J201.4 R204.1
SWCLK_PIN: R204.2 U200.36
SWDIO: D202.K1 J201.3 R203.1
SWDIO_PIN: R203.2 U200.35
SWO: C103.1 L101.1 U101.5
UART_BT_RX: U401.30 U402.12
UART_BT_TX: U401.31 U402.16
UART_MCU_RX: U200.29 U402.15
UART_MCU_TX: U200.32 U402.11
UART_PGR_RX: U400.3 U402.1
UART_PGR_TX: U400.2 U402.13
UART_SELECT: C407.2 Q402.1 Q403.1 R406.2 SW.2 U402.14
USB_D_N: D201.3 J200.A7 J200.B7
USB_D_P: D201.4 J200.A6 J200.B6
VBUS1: C107.2 D201.5 J200.A4B9 J200.B4A9 L102.1
VBUS2: C111.2 D400.5 J400.A4B9 J400.B4A9 L103.1
WRITE_PROTECT: U200.41 U700.3
pads on no net: J200.A8 J200.B8 J200.MH J200.SH J400.A8 J400.B8 J400.MH J400.SH SW.3 U200.1 U200.2 U200.3 U200.13 U200.16 U200.19 U200.21 U200.24 U200.27 U200.28 U200.30 U200.31 U200.37 U200.46 U200.47 U400.4 U400.7 U400.8 U400.9 U400.10 U400.11 U400.12 U400.15 U401.4 U401.5 U401.6 U401.7 U401.9 U401.10 U401.13 U401.15 U401.16 U401.17 U401.18 U401.19 U401.20 U401.21 U401.22 U401.23 U401.24 U401.25 U401.26 U401.27 U401.28 U401.29 U401.32 U401.33 U401.34 U401.35 U402.3 U402.4 U402.5 U402.6 U402.7 U402.8 U402.9 U501.4 U501.6 U501.9 U501.10 U501.11 U502.3 U502.6 U603.4